# Altium PCB ATP采集.PcbDoc
Units mm, origin at the board's own origin, x right, y up, seen from the top; angles counter-clockwise.
Board outline 63 x 50 mm, 2 copper layers (Top Layer, Bottom Layer); 35 components, 27 nets, 132 pads, 45 vias.
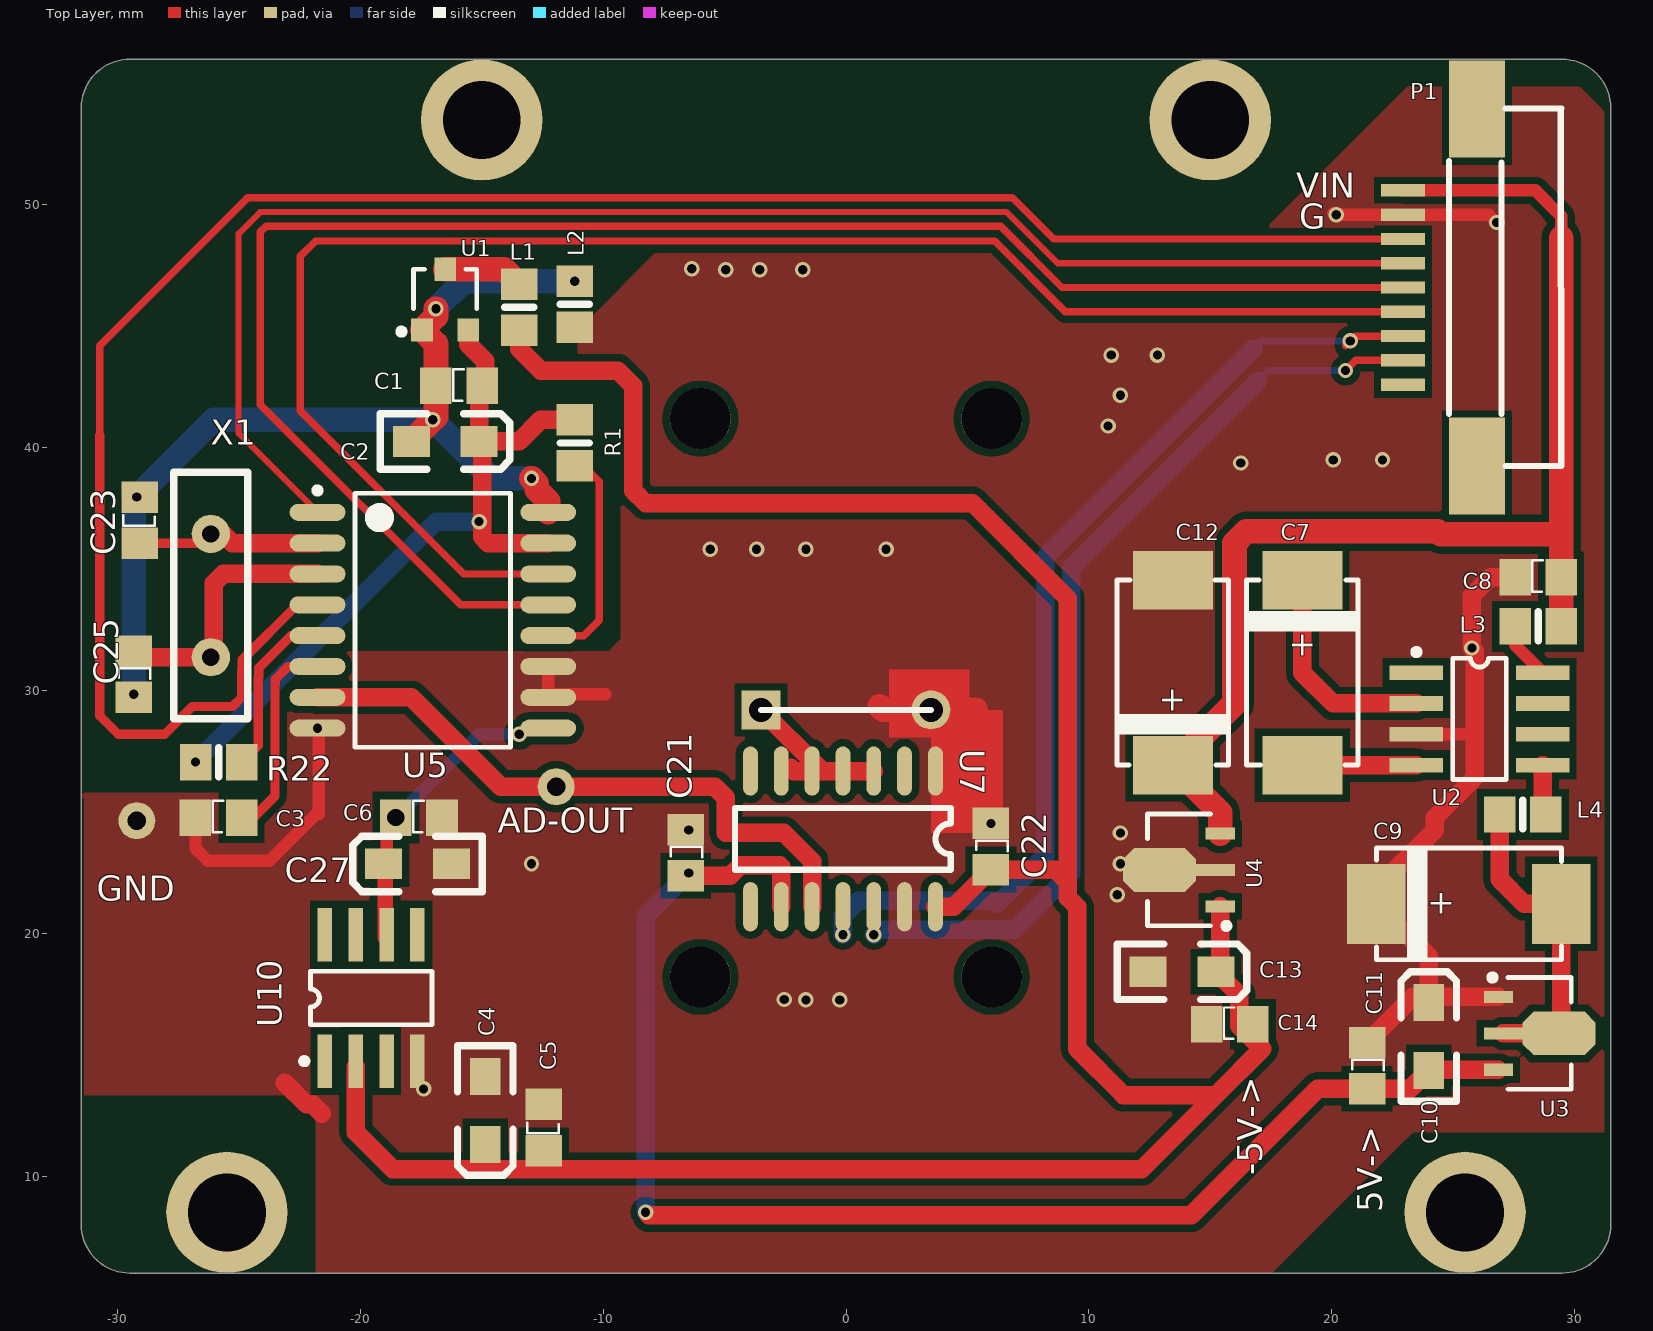
[diagram p0: Top Layer view]
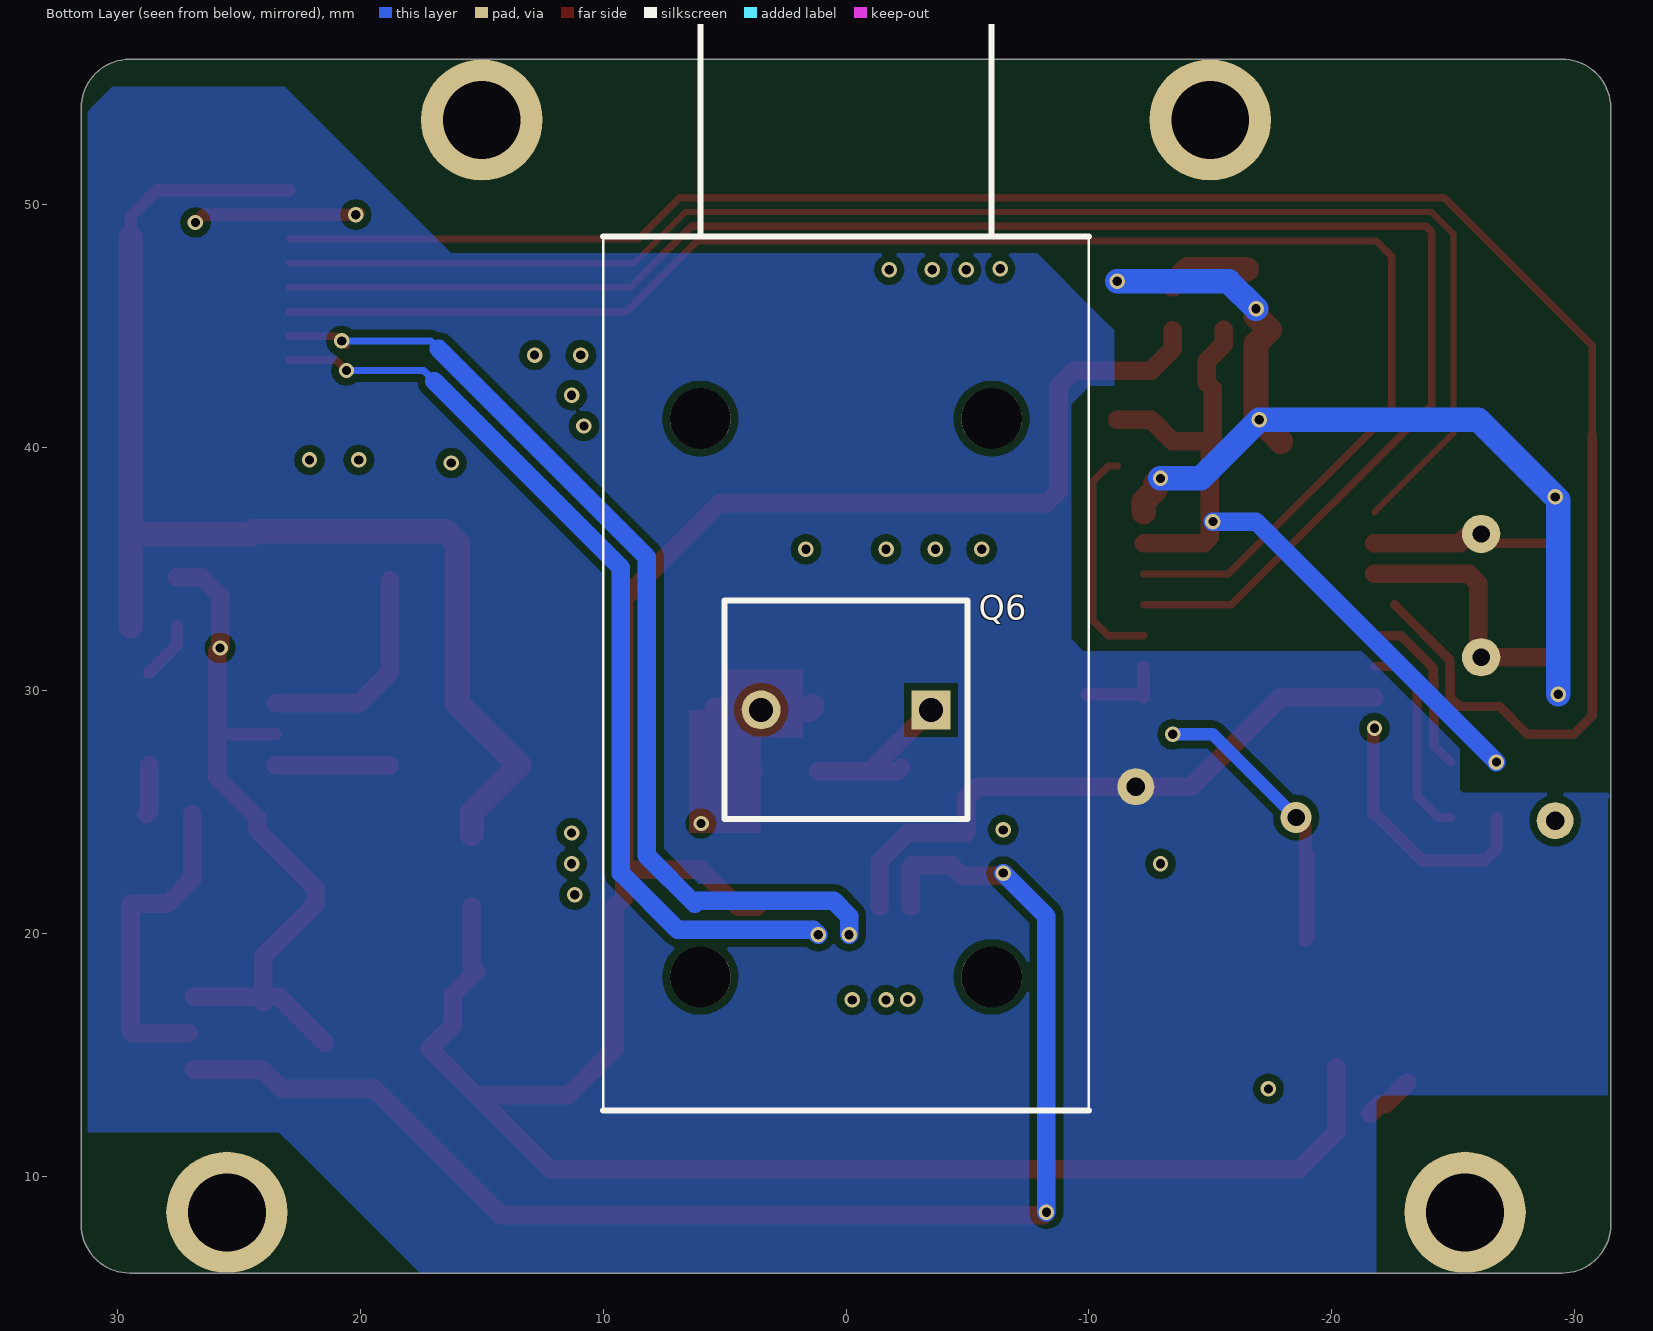
[diagram p1: Bottom Layer view, seen from below]
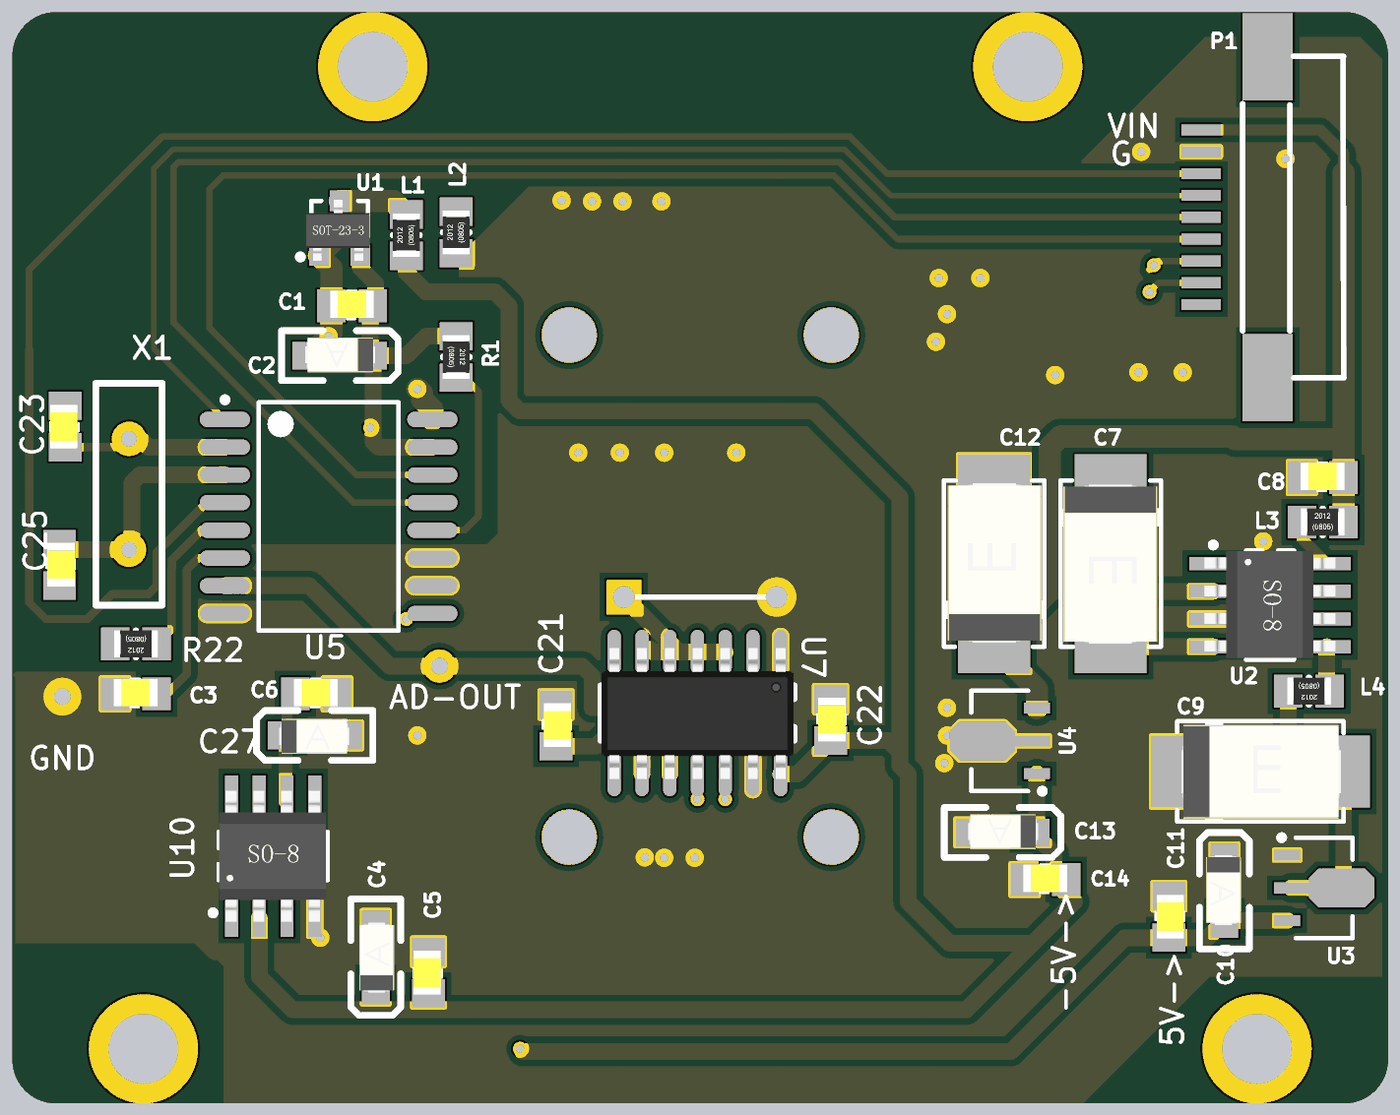
[diagram p2: 3D render of the assembled board from above, using the file's embedded part models]

## Layer stack, top to bottom
Top Layer: signal copper 0.0356
Dielectric: dielectric 0.32, FR-4, Dk 4.8
Bottom Layer: signal copper 0.0356

## Board outline
-31.5,8 -31.5,54 -31.5,54.018 cw(c-29.5,54) -29.482,56 -29.5,56 29.5,56 cw(c29.5,54) 31.5,54 31.5,8 cw(c29.5,8) 29.5,6 -29.5,6 cw(c-29.5,8)

## Design rules (kind name [scope] priority, off if disabled: settings)
Clearance [All] p1: gap=0.305
ComponentClearance [All] p1 off: gap=0.254 collisioncheckmode=3 verticalgap=0.254 showdistances=FALSE
PolygonConnect [All] p1: connectstyle=Direct reliefconductorwidth=0.254 reliefentries=4 polygonreliefangle="90 Angle"
RoutingVias [All] p1: holewidth=0.381 width=0.635 viastyle="Through Hole" minholewidth=0.381 minwidth=0.635 maxholewidth=0.711 maxwidth=1.27
SilkscreenOverComponentPads [All] p1: minsilkscreentomaskgap=0.254
SolderMaskExpansion [All] p1: expansion=0.102
Width [All] p1: maxlimit=2.54 minlimit=0.178 preferedwidth=0.254
26 further rules are at their usual default settings.

## Classes and differential pairs
component class U_APT: C1 C2 C3 C4 C5 C6 C21 C22 C23 C25 C27 L1 L2 Q6 R1 R22 U1 U5 U7 U10 X1
component class U_Power: C7 C8 C9 C10 C11 C12 C13 C14 L3 L4 U2 U3 U4
component class Interface: P1

## Components (designator, comment, footprint, x,y, rotation, side; value= is the part's Value field where it differs from the comment)
C1 "0.1uF" C2012 -16.891,42.545 r0 top
C2 "100uF/6.3V" 3216 -15.113,40.259 r0 top
C3 "0.1uF" C2012 -26.797,24.765 r0 top
C4 "100uF/6.3V" 3216 -14.859,11.303 r270 top
C5 "0.1uF" C2012 -12.446,11.049 r90 top
C6 "0.1uF" C2012 -18.542,24.765 r0 top
C7 "100uF/16V" C7343 18.796,30.734 r90 top
C8 "0.1uF" C2012 27.559,34.671 r0 top
C9 "100uF/16V" C7343 25.654,21.209 r180 top
C10 "100uF/6.3V" 3216 24.003,17.145 r90 top
C11 "0.1uF" C2012 21.463,15.494 r270 top
C12 "100uF/16V" C7343 13.462,30.734 r270 top
C13 "100uF/6.3V" 3216 15.24,18.415 r0 top
C14 "0.1uF" C2012 14.859,16.256 r0 top
C21 "10uF" C2012 -6.604,24.268 r270 top
C22 "10uF" C2012 5.969,24.522 r270 top
C23 "15p" C2012 -29.083,36.068 r90 top
C25 "15p" C2012 -29.337,31.623 r270 top
C27 "100uF/6.3V" 3216 -19.05,22.86 r180 top
L1 "GZ2012D121TF" 2012 -13.462,44.831 r90 top
L2 "GZ2012D121TF" 2012 -11.176,44.958 r90 top
L3 "GZ2012D121TF" 2012 27.559,32.639 r0 top
L4 "GZ2012D121TF" 2012 28.829,24.892 r180 top
P1 "Header 9" FPC-9A 25.908,47.244 r90 top
Q6 "荧光检测电池" TO-220_A 0,29.2 r0 bottom locked
R1 "10K" 2012 -11.176,41.148 r270 top
R22 "10K" 2012 -24.892,27.051 r180 top
U1 "XC6206P332MR" sot-23 -16.51,46.101 r0 top
U2 "ICL7662" so8 23.495,30.734 r0 top
U3 "79L05" SOT89L 28.575,15.875 r0 top
U4 "78L05" SOT89L 13.716,22.606 r180 top
U5 "TM7705" AD7705BR -17.018,32.893 r0 top
U7 "IVC102" so-14 -0.127,23.887 r270 top
U10 "REF192" so8 -21.463,14.732 r90 top
X1 "1.8432MMhz" XTAL1 -26.162,36.449 r270 top

## Footprints (in the part's own frame and the unit in brackets; to place one, negate y for a bottom-side part, rotate by r counter-clockwise, add the part's x,y. Pads: shape width x height; smd on the part's side, far side on the other; paste and mask are expansions set on the pad)
2012 [mm]
  rect 1.3x1.5 smd: 1(0,0) 2(1.9,0)
  silkscreen extent 0.95,-0.6 0.95,0.6, body extent -0.05,-0.62 1.95,0.62, height 0.45
3216 [mil]
  rect 60x50 smd: 1(0,0) 2(-110,0)
  silkscreen extent -160,-45 50,45, body extent -117,-30 9,33, height 63
AD7705BR [mm]
  oval 2.3x0.7 smd: 1(-4.75,4.445) 2(-4.75,3.175) 3(-4.75,1.905) 4(-4.75,0.635) 5(-4.75,-0.635) 6(-4.75,-1.905) 7(-4.75,-3.175) 8(-4.75,-4.445) 9(4.75,-4.445) 10(4.75,-3.175) 11(4.75,-1.905) 12(4.75,-0.635) 13(4.75,0.635) 14(4.75,1.905) 15(4.75,3.175) 16(4.75,4.445)
  silkscreen extent -4.87,-5.23 3.2,5.47
C2012 [mm]
  rect 1.3x1.5 smd: 1(0,0) 2(1.9,0)
  silkscreen extent 0.71,-0.61 1.14,0.69, body extent -0.06,-0.56 1.94,0.69, height 0.5
C7343 [mm] "7.62mm*4.6mm"
  rect 2.4x3.3 smd: 1(3.81,0) 2(-3.81,0)
  silkscreen extent -3.81,-2.3 3.81,2.31, body extent -3.68,-2.13 3.62,2.17, height 4.1
FPC-9A [mm]
  rect 4x2.3 smd: 0(-7.996,-0.082) 0(6.704,-0.082)
  rect 0.508x1.8 smd: 1(3.354,2.968) 2(2.354,2.968) 3(1.354,2.968) 4(0.354,2.968) 5(-0.646,2.968) 6(-1.646,2.968) 7(-2.646,2.968) 8(-3.646,2.968) 9(-4.646,2.968)
  silkscreen extent -8,-3.57 6.73,1.07
so8 [mm]
  rect 2.2x0.6 smd: 1(0,0) 2(0,-1.27) 3(0,-2.54) 4(0,-3.81) 5(5.2,-3.81) 6(5.2,-2.54) 7(5.2,-1.27) 8(5.2,0)
  silkscreen extent -0.12,-4.4 3.7,0.97, body extent -1.12,-4.33 6.29,0.57, height 1.7
so-14 [mil]
  oval 80x24 smd: 1(-110,150) 2(-110,100) 3(-110,50) 4(-110,0) 5(-110,-50) 6(-110,-100) 7(-110,-150) 8(110,-150) 9(110,-100) 10(110,-50) 11(110,0) 12(110,50) 13(110,100) 14(110,150)
  silkscreen extent -50,-175 50,175, body extent -117,-173 119,173, height 67
SOT89L [mm] "SOT89, 3-Leads, Body 4.5x2.4 mm, Pitch 1.5mm, Lead Span 4.1mm, IPC High Density"
  rect 1.2x0.5 smd: 1(-1.7,1.5) 3(-1.7,-1.5)
  rect 1.6x0.5 smd: 2(-1.5,0)
  oct 3x1.8 smd: 2(0.8,0)
  silkscreen extent -2.07,-2.3 1.3,2.42, body extent -1.3,-2.3 1.3,2.3, height 1.6
sot-23 [mm]
  rect 0.9x0.95 smd: 1(-0.95,-1.25) 2(0.95,-1.25) 3(0,1.25)
  silkscreen extent -1.93,-1.45 1.3,1.25, body extent -1.53,-1.5 1.37,1.3, height 1.2
TO-220_A [mm] "TO, Thru-Hole,"
  rect 1.6x1.6 hole 1: 1(-3.5,0)
  round 1.6 hole 1: 3(3.5,0)
XTAL1 [mil]
  round 62 hole 28: 1(0,0) 2(200,0)
  silkscreen extent -100,-60 300,60

## Part data
C1 C5 C6: library part Cap, "Capacitor"
C2 C4 C7 C9 C10 C12 C13: library part "Cap Pol1", "Polarized Capacitor (Radial)"
C3 C8 C11 C14: library part CAP, "Capacitor"
C21 C22: library part Cap, "Cap"
C23 C25: library part CAP, "Cap"
C27: library part "Cap Pol1", "Polarized Capacitor (R"
L1 L2 L3 L4 R1: library part Res2, "Resistor"
P1: "Header, 9-Pin"
Q6: library part "Photo NPN", "NPN Phototransistor"
R22: library part Res2, "Re"
U1: library part "Header 3", "Header, 3-Pin"
U3 U4: library part LM117T
U10: library part I
X1: library part CRYSTAL, "Crystal"

## Free pads (board coordinates)
  round 5 hole 3.2: 0(-25.5,8.5) 0(-15,53.5) 0(15,53.5) 0(25.5,8.5)
  round 2.5 hole 2.5: 0(-6,18.2) 0(-6,41.2) 0(6,18.2) 0(6,41.2)
  round 1.524 hole 0.762: 2(-11.938,26.035) 4(-29.21,24.638)

## Via types
v1: diameter 0.635, hole 0.381, Top Layer to Bottom Layer, 44 vias
v2: diameter 1.27, hole 0.711, Top Layer to Bottom Layer, 1 vias

## Nets (pads, with @x,y where several pads share a name; then routed paths per layer and width w, separated by ;. In a path a pad name is that pad's centre, name@x,y a point inside that pad or via, vN(x,y) a via of type N, cw(c..) or ccw(c..) an arc to the next point about the centre after c; other vN are vias at no path point)
+5VA: C4.1 C5.1 C13.1 C14.2 C22.2 L1.1 U4.1 U7.14 U10.2 | length 111.1
  Top Layer w0.762: U10.2@-20.193,14.478 -20.193,11.811 -18.669,10.287 12.192,10.287 15.24,13.335 ; L1.1 -13.462,44.069 -12.573,43.18 -9.398,43.18 -8.763,42.545 -8.763,38.227 -8.255,37.719 5.207,37.719 9.144,33.782 9.144,22.098 ; U7.14 3.683,21.082 4.429,21.082 C22.2 8.62,22.622 9.144,22.098 ; U4.1 15.416,18.591 C13.1 16.195,17.46 16.195,16.19 17.145,15.24 15.24,13.335 ; 9.144,22.098 9.144,21.463 9.525,21.082 9.525,15.24 11.43,13.335 15.24,13.335
-5VA: C10.2 C11.2 C21.2 U3.3 U7.9 | length 58
  Top Layer w0.762: v1@-8.128,8.382 14.224,8.382 19.436,13.594 C11.2 23.246,13.594 C10.2 24.027,14.375 U3.3 ; C21.2 -4.774,22.368 -4.347,22.795 -2.729,22.795 -2.667,22.733 U7.9
  Bottom Layer w0.762: v1(-8.255,8.509) -8.255,20.701 v1(-6.477,22.479)
-VIN: C9.2 L4.2 U3.2 | length 13.3
  Top Layer w0.762: L4.2 26.929,22.22 27.94,21.209 C9.2 29.464,15.964 29.375,15.875 U3.2@27.075,15.875
AD_CS: P1.3 U5.4 | length 83.7
  Top Layer w0.305: -30.734,40.513 -30.734,44.196 -24.638,50.292 6.858,50.292 8.552,48.598 P1.3
  Top Layer w0.381: -30.734,40.513 -30.734,28.956 -29.972,28.194 -28.067,28.194 -26.924,29.337 -25.273,29.337 -24.892,29.718 -24.892,30.812 -24.879,30.825 -24.879,31.255 U5.4@-22.606,33.528
AD_OUT: pad.2 U5.7 U7.10 | length 25.9
  Top Layer w0.762: U5.7 -17.907,29.718 -14.224,26.035 pad.2 -5.403,26.035 -4.953,25.585 -4.953,24.13 -2.555,24.13 -1.397,22.972 U7.10
AGND: C3.1 C4.2 C5.2 C6.2 C8.1 C9.1 C10.1 C11.1 C12.2 C13.2 C14.1 C21.1 C22.1 C27.2 L2.1 P1.2 pad.4 Q6.3 U2.3 U3.1 U4.2 U5.8 U5.10 U5.11 U7.1 U7.13 U10.4 | length 60.7
  Top Layer w0.508: C3.1 -26.797,23.495 -26.289,22.987 -23.749,22.987 -21.844,24.892 -21.717,24.892 -21.717,28.397 v1(-21.768,28.448) ; U5.11 U5.10 -12.141,29.845 -9.906,29.845 ; U7.1 3.81,26.681 v1(5.969,24.522) ; v1@20.066,49.657 20.125,49.598 P1.2 26.475,49.598 v1(26.797,49.276) ; U2.3 25.781,28.194
  Top Layer w0.762: -23.114,13.843 -22.217,12.946 -21.963,12.946 -21.59,12.573 ; C11.1 23.344,17.375 C10.1@24.003,17.375 ; C10.1 C10.1@24.003,17.375 ; U3.1 C10.1@24.003,17.375 ; C8.1 26.543,34.671 25.781,33.909 v1(25.781,31.75) 25.908,31.623 25.908,26.416 24.257,24.765 24.257,24.257 21.844,21.844 C9.1 24.003,19.05 C10.1@24.003,17.375
  Top Layer w1.016: 1.397,29.337 1.534,29.2 Q6.3 5.324,29.2 5.334,29.21
  other v1: -17.399,13.589 -1.651,17.254 -0.254,17.254 -2.54,17.272 11.176,21.59 -12.954,22.86 11.303,22.86 11.303,24.13 -6.477,24.257 -5.588,35.814 -3.683,35.814 -1.651,35.814 1.651,35.814 16.256,39.37 20.066,39.497 22.098,39.497 10.795,40.894 11.303,42.164 10.922,43.815 12.827,43.815 -4.953,47.328 -3.556,47.328 -1.778,47.328 -6.35,47.371 20.193,49.598
CLK: P1.4 U5.1 | length 62
  Top Layer w0.254: U5.1 -25.019,40.589 -25.019,48.819 -24.13,49.708 6.616,49.708 8.725,47.598 P1.4
GND: C1.1 C2.2 C23.2 C25.2 L2.2 U1.1 U5.16 | length 41
  Top Layer w1.016: C2.2 v1(-17.018,41.148) -16.891,41.275 C1.1 -16.891,44.282 U1.1 -16.891,45.42 v1(-16.891,45.72) ; v1(-12.954,38.735) -12.739,38.52 -12.739,38.261 -12.268,37.791 U5.16
  Bottom Layer w1.016: v1(-29.337,29.845) -29.337,37.846 v1(-29.21,37.973) -26.035,41.148 v1(-17.018,41.148) -14.605,38.735 v1(-12.954,38.735) ; v1(-16.891,45.72) -15.753,46.858 v1(-11.176,46.858)
IO_1: P1.7 U7.11 | length 41.3
  Top Layer w0.305: v1@20.574,44.196 v1(20.775,44.397) 20.976,44.598 P1.7
  Bottom Layer w0.305: 16.779,44.069 17.108,44.397 v1(20.775,44.397)
  Bottom Layer w0.762: v1(-0.127,19.939) -0.127,20.701 0.508,21.336 6.096,21.336 6.223,21.209 8.204,23.19 8.204,35.494 16.779,44.069
IO_2: P1.8 U7.12 | length 39
  Top Layer w0.305: v1(20.574,43.18) 20.992,43.598 P1.8
  Bottom Layer w0.305: 16.954,42.735 17.399,43.18 v1(20.574,43.18)
  Bottom Layer w0.762: v1(1.143,19.939) 1.34,20.136 6.928,20.136 9.271,22.479 9.271,35.052 16.954,42.735
IO_3: P1.9
MISO: P1.5 U5.13 | length 70.6
  Top Layer w0.305: U5.13 -15.875,33.528 -24.123,41.776 -24.123,48.888 -23.888,49.124 6.374,49.124 8.899,46.598 P1.5
MOSI: P1.6 U5.14 | length 66.2
  Top Layer w0.305: U5.14 -15.748,34.798 -22.479,41.529 -22.479,47.879 -21.844,48.514 6.122,48.514 9.037,45.598 P1.6
NetC3_2: C3.2 U5.6 | length 8.5
  Top Layer w0.381: C3.2 -24.409,24.765 -23.52,25.654 -23.52,30.219 -23.508,30.231 -23.508,30.467 -22.987,30.988 U5.6
NetC7_1: C7.1 U2.2 | length 9
  Top Layer w0.762: C7.1 18.796,30.734 20.066,29.464 U2.2
NetC7_2: C7.2 U2.4 | length 4.7
  Top Layer w0.762: C7.2 U2.4
NetC23_1: C23.1 U5.2 X1.1 | length 7.5
  Top Layer w0.381: C23.1 -26.543,36.068 X1.1
  Top Layer w0.762: X1.1@-25.908,36.703 -25.273,36.068 U5.2
NetC25_1: C25.1 U5.3 X1.2 | length 10.4
  Top Layer w0.762: C25.1 -29.083,31.369 X1.2 ; X1.2@-26.035,31.75 -26.035,34.417 -25.654,34.798 U5.3
NetL1_2: L1.2 U1.3 | length 3.3
  Top Layer w1.016: U1.3 -14.082,47.351 L1.2
NetL3_1: L3.1 U2.8 | length 2.4
  Top Layer w0.508: L3.1 27.559,31.87 U2.8
NetL4_1: L4.1 U2.5 | length 2.1
  Top Layer w0.762: U2.5 28.695,25.026 L4.1
NetQ6_1: Q6.1 U7.3 U7.4 U7.5 U7.6 | length 7
  Top Layer w0.762: Q6.1 -0.981,26.681 ; -2.286,26.808 -2.159,26.681 U7.5 -0.981,26.681 ; U7.3 U7.4 -0.981,26.681
NetR1_2: R1.2 U5.12 | length 9.4
  Top Layer w0.305: U5.12 -10.795,32.258 -10.16,32.893 -10.16,38.608 -10.8,39.248 R1.2
NetR22_1: R22.1 U5.5 | length 7.1
  Top Layer w0.381: R22.1 -24.206,27.737 -24.206,30.516 -24.194,30.528 -24.194,30.924 -22.86,32.258 U5.5
REF3V3: C6.1 C27.1 U5.9 U10.6 | length 15.1
  Top Layer w0.508: C27.1@-19.05,23.241 C27.1 -19.05,19.805 U10.6@-18.923,19.678 ; U10.6 -18.923,24.384 v2(-18.542,24.765)
  Bottom Layer w0.508: v2(-18.542,24.765) -15.113,28.194 v1(-13.462,28.194)
VDD_3V3: C1.2 C2.1 R1.1 R22.2 U1.2 U5.15 | length 31.9
  Top Layer w0.762: U1.2 -15.56,44.262 -14.859,43.561 -14.859,42.677 C1.2 -15.113,42.423 C2.1 ; U5.15 -14.732,36.068 -14.986,36.322 -14.986,40.132 C2.1 ; R1.1 -12.573,41.148 -13.462,40.259 C2.1
  Bottom Layer w0.762: v1(-26.792,27.051) -16.886,36.957 v1(-15.113,36.957)
VIN: C8.2 C12.1 L3.2 P1.1 U4.3 | length 51.4
  Top Layer w0.508: P1.1 28.396,50.598 29.459,49.535 29.459,48.641
  Top Layer w1.016: U4.3 15.416,24.97 C12.1 16.002,29.464 16.002,36.068 16.491,36.557 24.382,36.557 24.503,36.435 29.318,36.435 29.459,36.576 ; L3.2 C8.2 29.459,36.576 ; 29.459,48.641 29.459,36.576
pads on no net: P1.0 U2.1 U2.6 U2.7 U7.2 U7.7 U7.8 U10.1 U10.3 U10.5 U10.7 U10.8

## Polygon pours and split planes (outlines as drawn)
AGND on Top Layer "Top Layer-No Net" (solid, remove dead copper, pour order 4): -30.988,13.335 -22.098,13.335 -21.844,13.081 -21.844,5.969 17.526,5.969 22.733,11.176 23.368,11.811 31.242,11.811 31.242,53.848 30.988,54.102 30.226,54.864 23.749,54.864 23.114,54.864 18.034,49.784 16.256,48.006 -6.985,48.006 -7.874,48.006 -10.668,45.212 -11.049,44.831 -11.049,42.545 -10.033,42.545 -9.398,41.91 -9.271,41.783 -9.271,32.131 -9.779,31.623 -13.208,31.623 -22.225,31.623 -22.479,31.369 -25.273,28.575 -25.273,26.162 -25.273,25.908 -25.4,25.781 -26.289,25.781 -31.369,25.781 -31.496,25.654 -31.369,25.527 -31.369,13.335 -30.988,13.335
AD_OUT on Bottom Layer "Top Layer-No Net" (solid, remove dead copper, pour order 3): -30.988,13.335 -22.098,13.335 -21.844,13.081 -21.844,5.969 17.526,5.969 22.733,11.176 23.368,11.811 31.242,11.811 31.242,53.848 30.988,54.102 30.226,54.864 23.749,54.864 23.114,54.864 18.034,49.784 16.256,48.006 -6.985,48.006 -7.874,48.006 -10.668,45.212 -11.049,44.831 -11.049,42.545 -10.033,42.545 -9.398,41.91 -9.271,41.783 -9.271,32.131 -9.779,31.623 -13.208,31.623 -22.225,31.623 -22.479,31.369 -25.273,28.575 -25.273,26.162 -25.273,25.908 -25.4,25.781 -26.289,25.781 -31.369,25.781 -31.496,25.654 -31.369,25.527 -31.369,13.335 -30.988,13.335

## Other copper
Top Layer:
  rectangle net AGND: 3.5,24.13 6.477,29.2
  rectangle net AGND: 1.778,28.067 5.08,30.861

## Silkscreen, mask and mechanical layers (free items; w line width, h text height)
Top Overlay:
  lines w0.254: -31.5,-0.254 -31.5,0.254 ; -29.976,-0.508 -31.5,0 ; -29.976,0.508 -31.5,0 ; -5.199,0 -31.5,0 ; -3.5,29.2 3.5,29.2 ; 5.199,0 31.5,0 ; 29.976,-0.508 31.5,0 ; 29.976,0.508 31.5,0 ; 31.5,-0.254 31.5,0.254 ; 36.492,9.524 37,8 ; 36.492,54.476 37,56 ; 36.746,8 37.254,8 ; 36.746,56 37.254,56 ; 37,26.736 37,8 ; 37,37.264 37,56 ; 37.508,9.524 37,8 ; 37.508,54.476 37,56
  text "VIN" at 18.542,50.292 h1.02
  text "G" at 18.669,49.022 h1.02
  text "48 (mm)" at 38.313,26.99 h1.52 r90
  text "AD-OUT" at -14.351,24.13 h1.02
  text "GND" at -30.861,21.336 h1.02
  text "-5V->" at 17.145,10.033 h1.02 r90
  text "5V->" at 22.098,8.509 h1.02 r90
  text "63 (mm)" at -4.945,-1.313 h1.52
Bottom Overlay:
  lines w0.1: -10,12.7 -10,48.7 ; 10,12.7 10,48.7
  lines w0.254: -10,12.7 10,12.7 ; -10,48.7 10,48.7 ; -6,48.7 -6,142.2 ; 6,48.7 6,142.2 ; -5,24.7 5,24.7 5,33.7 -5,33.7 -5,24.7
Mechanical 1:
  lines w0.1: -31.5,54 -31.5,8 ccw(c-29.5,8) -29.5,6 29.5,6 ccw(c29.5,8) 31.5,8 31.5,54 ccw(c29.5,54) 29.5,56 ; -31.5,54.018 cw(c-29.5,54) -29.482,56
  lines w0.127: -29.5,56 29.5,56
  lines w0.254: -3,12.7 -3,15.7 3,15.7 3,12.7 -3,12.7

## Text inside footprints (layer, text, board x,y; h text height)
C7: Top Overlay "+" at 19.228,31.293 h1 r90
C9: Top Overlay "+" at 25.095,21.641 h1 r180
C12: Top Overlay "+" at 13.03,30.175 h1 r270